# Altium PCB PCB_bug.PcbDoc
Units mil, origin at the board's own origin, x right, y up, seen from the top; angles counter-clockwise.
Board outline 1769.05 x 2764.76 mil, 2 copper layers (Top Layer, Bottom Layer); 72 components, 51 nets, 277 pads, 40 vias.
Unrouted connection lines stored in the file: 1.
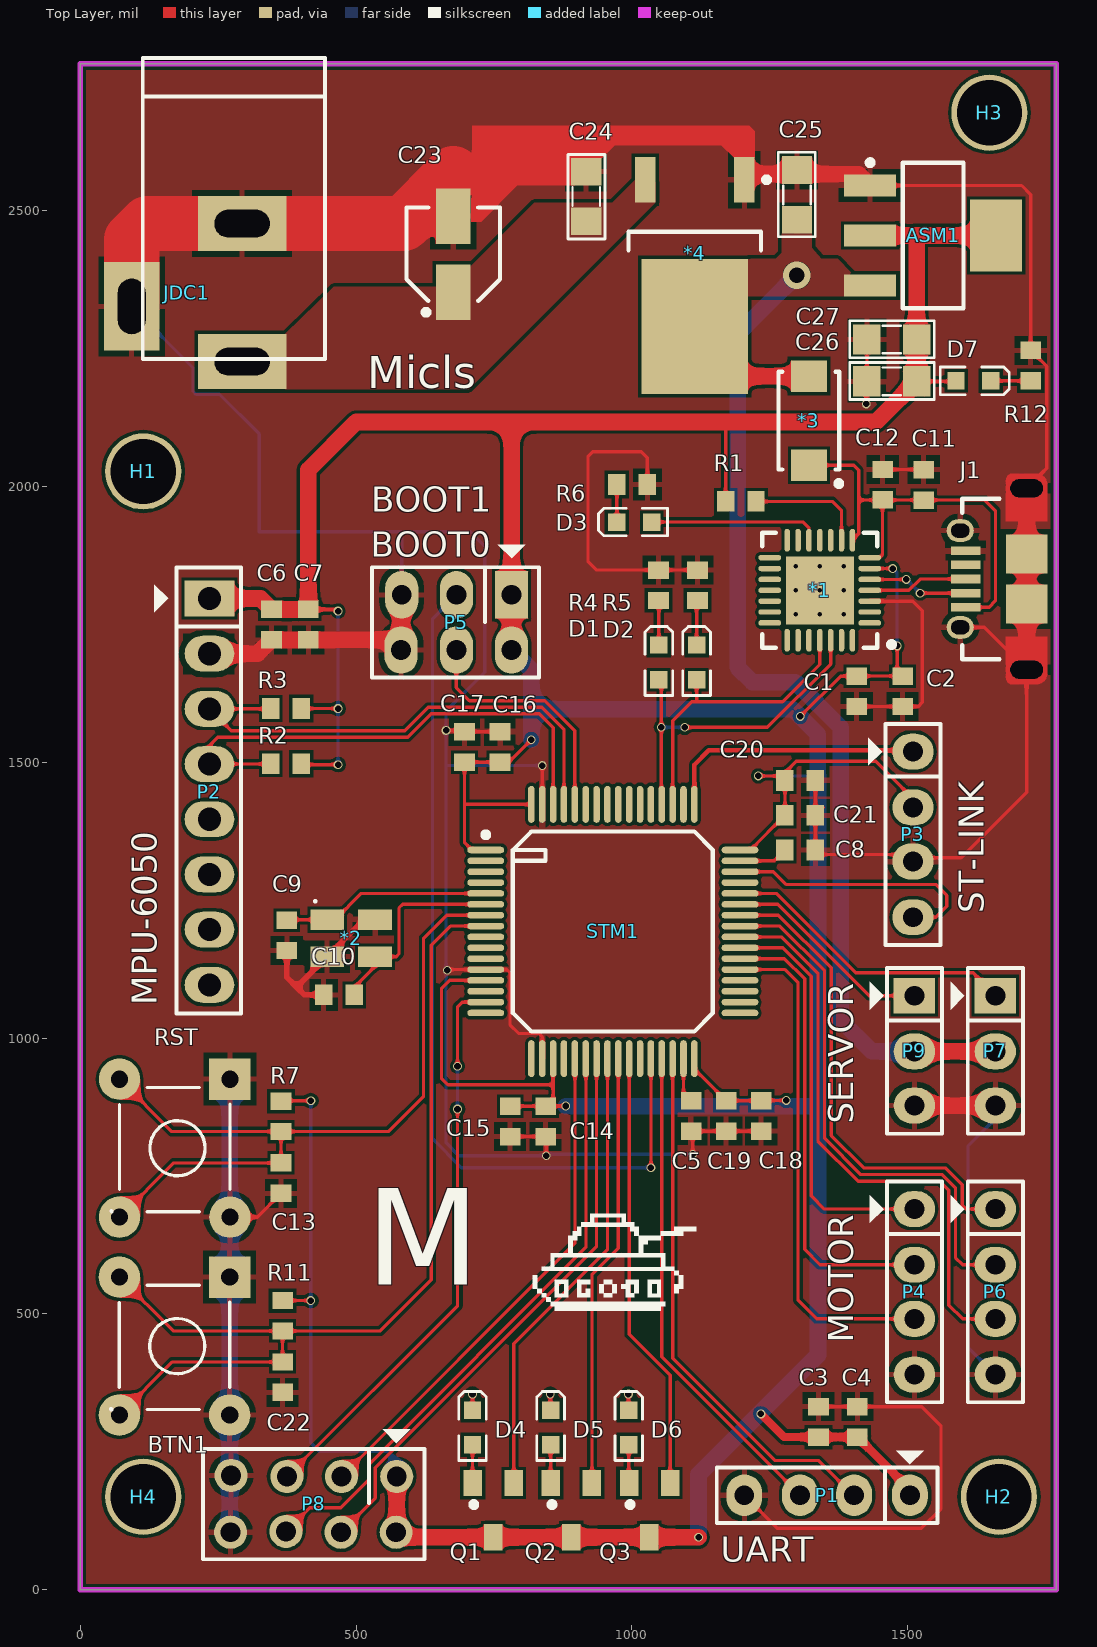
[diagram p0: Top Layer view]
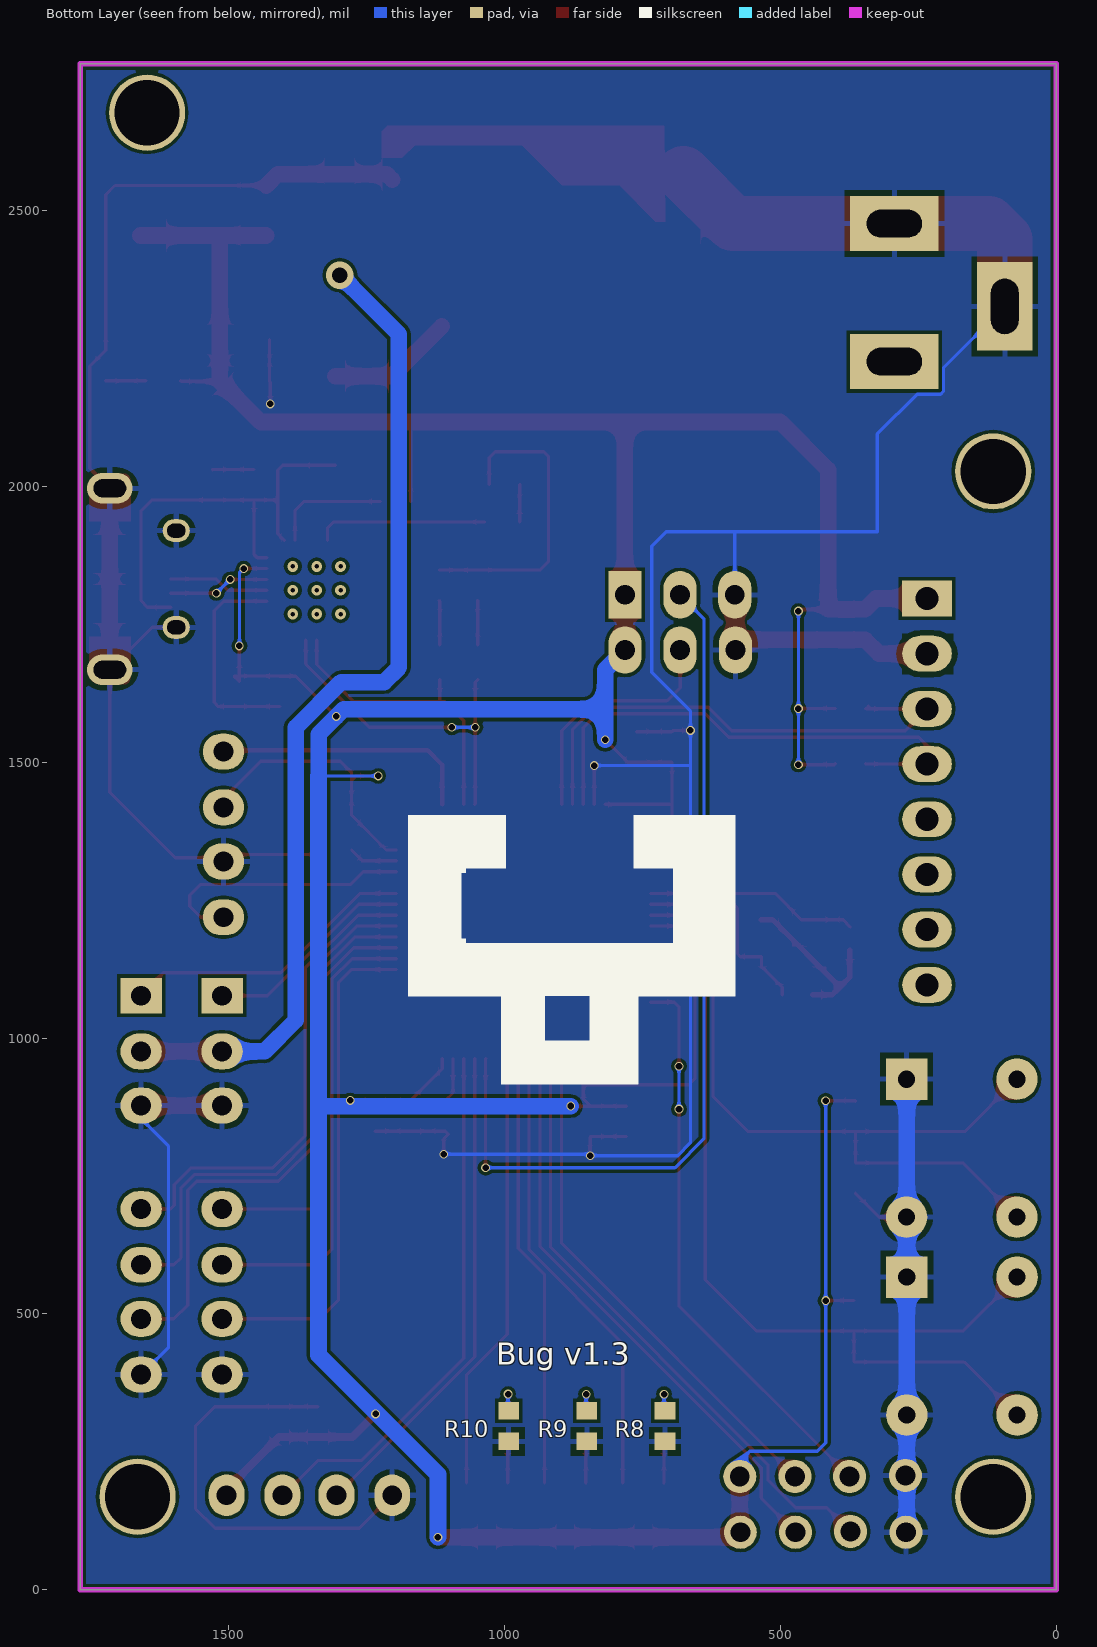
[diagram p1: Bottom Layer view, seen from below]
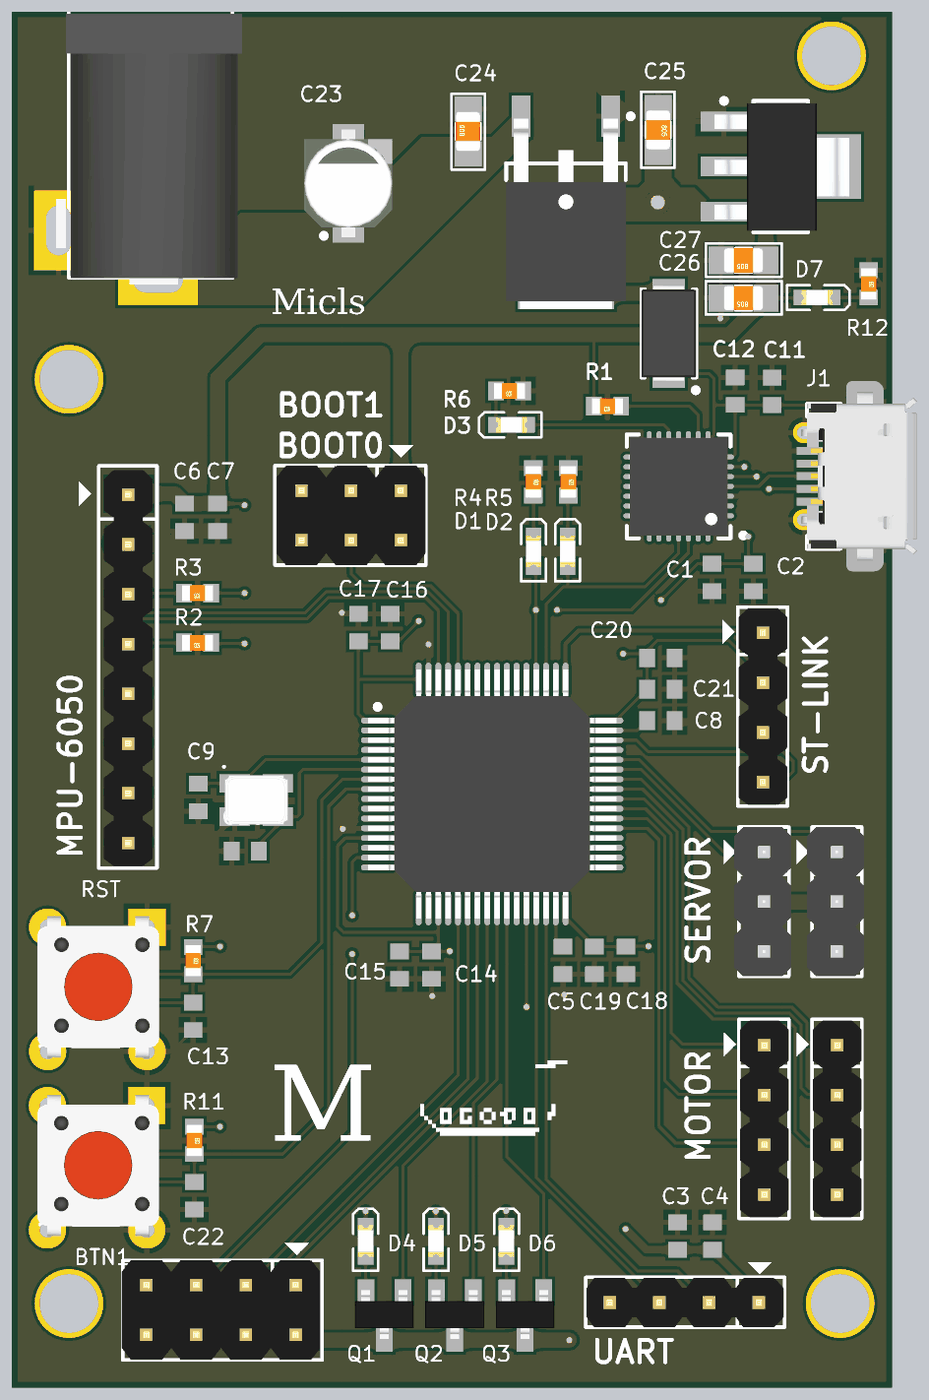
[diagram p2: 3D render of the assembled board from above, using the file's embedded part models]
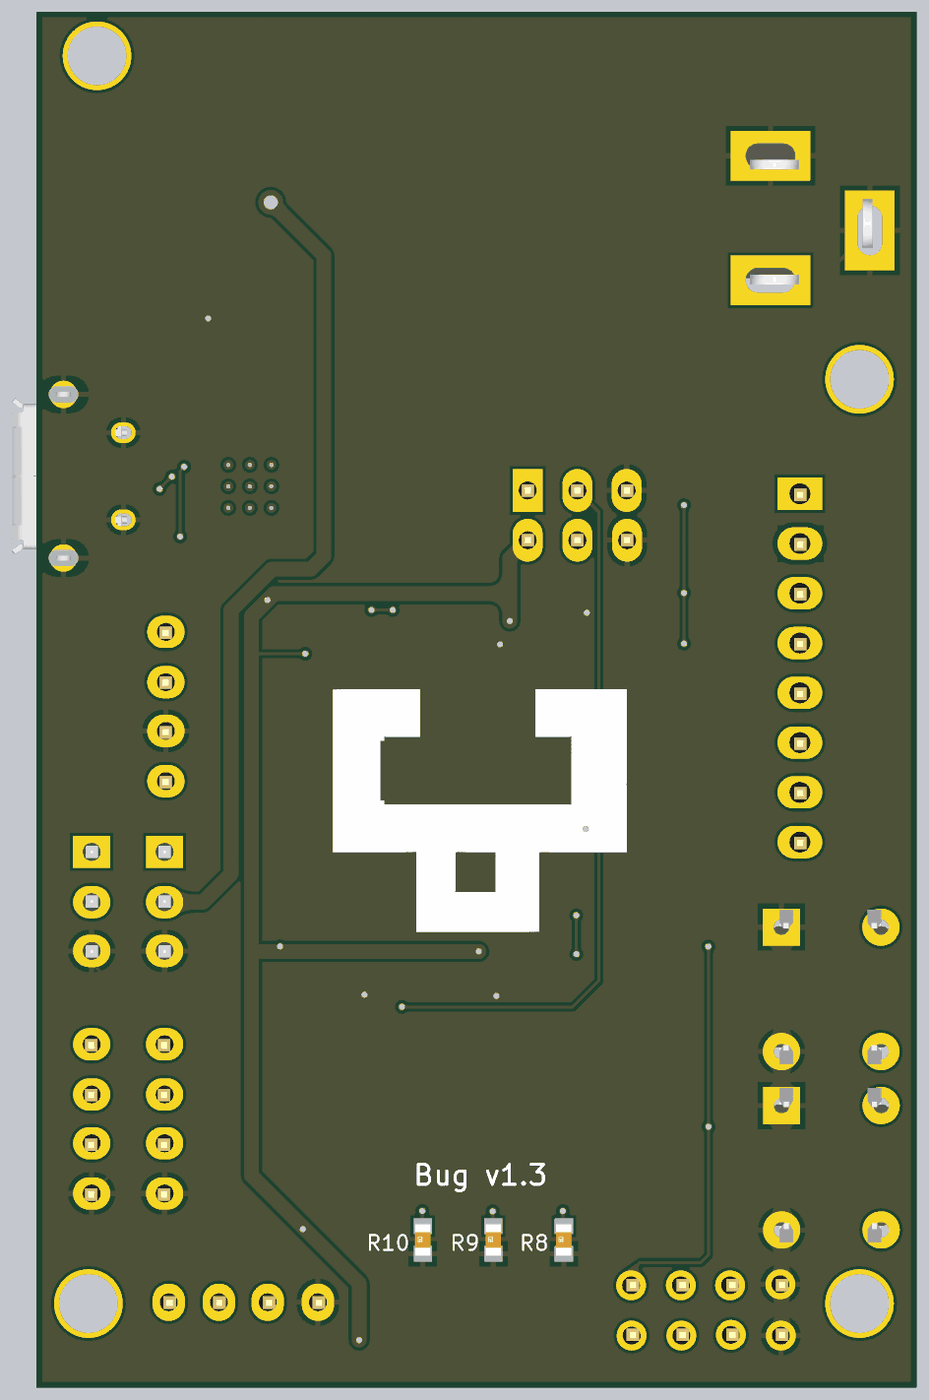
[diagram p3: 3D render of the assembled board from below, using the file's embedded part models]

## Layer stack, top to bottom
Top Solder: solder mask 0.4, Solder Resist, Dk 3.5
Top Layer: signal copper 1.4
Dielectric 1: dielectric 12.6, FR-4, Dk 4.8
Bottom Layer: signal copper 1.4
Bottom Solder: solder mask 0.4, Solder Resist, Dk 3.5

## Board outline
0,0 1769.05,0 1769.05,2764.76 0,2764.76

## Design rules (kind name [scope] priority, off if disabled: settings)
Clearance [All] p1: gap=6 ignorepadtopadclearanceinfootprint=FALSE
DiffPairsRouting [All] p1: maxlimit=10 minlimit=10 mostfreqgap=10 toplayer_minwidth=6 toplayer_maxwidth=30 toplayer_prefwidth=15 bottomlayer_minwidth=6 bottomlayer_maxwidth=30 bottomlayer_prefwidth=15 maxuncoupledlength=500
HoleToHoleClearance [All] p1: gap=6 allowstackedmicrovias=TRUE
MinimumSolderMaskSliver [All] p1: minsoldermaskwidth=6
PolygonConnect PolygonConnect_1 [InNet('Net*_3') vs InNet('Net*_3')] p1: connectstyle=Direct reliefconductorwidth=10 reliefentries=4 polygonreliefangle="90 Angle" airgapwidth=10
PolygonConnect [InNet('GND') vs InNet('GND')] p2: thpad.connectstyle=Relief thpad.reliefconductorwidth=10 thpad.reliefentries=4 thpad.polygonreliefangle="90 Angle" thpad.airgapwidth=10 smdpad.connectstyle=Relief smdpad.reliefconductorwidth=10 smdpad.reliefentries=4 smdpad.polygonreliefangle="90 Angle" smdpad.airgapwidth=10 via.connectstyle=Direct via.reliefconductorwidth=10 via.reliefentries=4 via.polygonreliefangle="90 Angle" via.airgapwidth=10
RoutingVias [All] p1: holewidth=11.81 width=15.75 viastyle="Through Hole" minholewidth=7.87 minwidth=15.75 maxholewidth=50 maxwidth=60
SilkToSilkClearance [All] p1: silktosilkclearance=6
SilkToSolderMaskClearance [IsPad] p1: minsilkscreentomaskgap=0 clearancetoexposedcopper=TRUE
SolderMaskExpansion [All] p1: expansion=0
Width [All] p1: maxlimit=100 minlimit=6 preferedwidth=30
25 further rules are at their usual default settings.

## Classes and differential pairs
differential pair D: +D_P -D_N

## Components (designator, comment, footprint, x,y, rotation, side; value= is the part's Value field where it differs from the comment)
*1 "CP2102" QFN50P500X500X90_HS-29N 1340.26,1811.16 r180 top
*2 "XTAL" "XTAL SMD 4PIN" 491.18,1180.84 r0 top
*3 "Diode" "DIODE SMA (DO-214AC)" 1320.53,2118.6 r270 top
*4 "LD1086" DPAK228P972X230-3N 1113.66,2381.67 r270 top
ASM1 "LM1117" SOT223-4N 1545.6,2453.95 r0 top value=LM317
BTN1 "SW" "Tact SW 4 pin" 271.2,566.89 r270 top value="Button chip 4 pin"
C1 "Cap Non-Pol SMD" CAP-SM-0603 1407.12,1628.11 r270 top value=100pF
C2 "Cap Non-Pol SMD" CAP-SM-0603 1490.22,1628.15 r270 top value=100pF
C3 "Cap Non-Pol SMD" CAP-SM-0603 1338.02,304.59 r90 top value=100pF
C4 "Cap Non-Pol SMD" CAP-SM-0603 1408.28,304.59 r90 top value=100pF
C5 "Cap Non-Pol SMD" CAP-SM-0603 1107.31,858.84 r90 top value=100pF
C6 "Cap Non-Pol SMD" CAP-SM-0603 346.81,1749 r270 top value=100pF
C7 "Cap Non-Pol SMD" CAP-SM-0603 413.54,1749 r270 top value=100pF
C8 "Cap Non-Pol SMD" CAP-SM-0603 1304.64,1340.53 r180 top value=100pF
C9 "Cap Non-Pol SMD" CAP-SM-0603 374.69,1186.13 r90 top value=100pF
C10 "Cap Non-Pol SMD" CAP-SM-0603 469.07,1078.13 r0 top value=100pF
C11 "Cap Non-Pol SMD" CAP-SM-0603 1528.47,2002.11 r90 top value=100pF
C12 "Cap Non-Pol SMD" CAP-SM-0603 1454.14,2002.43 r90 top value=100pF
C13 "Cap Non-Pol SMD" CAP-SM-0603 364.15,746.16 r270 top value=100pF
C14 "Cap Non-Pol SMD" CAP-SM-0603 843.55,849.01 r270 top value=100pF
C15 "Cap Non-Pol SMD" CAP-SM-0603 779.26,849.01 r270 top value=100pF
C16 "Cap Non-Pol SMD" CAP-SM-0603 760.78,1527.43 r90 top value=100pF
C17 "Cap Non-Pol SMD" CAP-SM-0603 696.52,1527.43 r90 top value=100pF
C18 "Cap Non-Pol SMD" CAP-SM-0603 1234.14,858.84 r270 top value=100pF
C19 "Cap Non-Pol SMD" CAP-SM-0603 1170.73,858.84 r270 top value=100pF
C20 "Cap Non-Pol SMD" CAP-SM-0603 1304.65,1466.57 r0 top value=100pF
C21 "Cap Non-Pol SMD" CAP-SM-0603 1304.65,1403.55 r0 top value=100pF
C22 "Cap Non-Pol SMD" CAP-SM-0603 366.99,385.52 r270 top value=100pF
C23 "Cap Pol SMD" "CAP ALU SIZE B" 676.18,2420.06 r90 top value=100pF
C24 "Cap Non-Pol SMD" CAP-SM-0805 916.98,2479.52 r90 top value=100pF
C25 "Cap Non-Pol SMD" CAP-SM-0805 1298.99,2572.53 r270 top value=100pF
C26 "Cap Non-Pol SMD" CAP-SM-0805 1515.63,2189.67 r180 top value=100pF
C27 "Cap Non-Pol SMD" CAP-SM-0805 1515.63,2265.56 r180 top value=100pF
D1 "LED SMD" LED_0603_Blue 1048.76,1680.43 r90 top
D2 "LED SMD" LED_0603_Blue 1117.05,1680.43 r90 top
D3 "LED SMD" LED_0603_Blue 1004.16,1934.74 r180 top
D4 "LED SMD" LED_0603_Blue 711.08,294.4 r90 top
D5 "LED SMD" LED_0603_Blue 852.64,294.4 r90 top
D6 "LED SMD" LED_0603_Blue 994.2,294.4 r90 top
D7 "LED SMD" LED_0603_Blue 1618.55,2190.57 r0 top
H1 "Hole" "LO KHOAN 3MM" 114.61,2026.37 r0 top
H2 "Hole" "LO KHOAN 3MM" 1664.88,169 r0 top
H3 "Hole" "LO KHOAN 3MM" 1647.55,2676.42 r0 top
H4 "Hole" "LO KHOAN 3MM" 114.61,169 r0 top
J1 "629105150921" 629105150921 1714.99,1831.57 r90 top
JDC1 "Jack DC" DC-IN 193.69,2350.45 r270 top value="Jac DC"
P1 "Header 4" JP4 1403.44,171.61 r180 top
P2 "Header 8" JP8 234.48,1796.31 r270 top
P3 "Header 4" JP4 1509.06,1418.78 r270 top
P4 "Header 4" JP4 1511.71,590.15 r270 top
P5 "Header 3X2" JP3x2 681.79,1752.97 r180 top
P6 "Header 4" JP4 1658.28,590.15 r270 top
P7 "Header 3" JP3 1658.28,976.65 r270 top
P8 "Header 4X2" JP4x2 423.29,156.1 r180 top
P9 "Header 3" JP3 1511.71,976.65 r270 top
Q1 "C1815" SOT23B 748.5,144.72 r180 top
Q2 "C1815" SOT23B 890.07,144.72 r180 top
Q3 "C1815" SOT23B 1031.64,144.72 r180 top
R1 "RESISTOR SMD" RES-SM-0603 1224.2,1972.13 r180 top value=1K
R2 "RESISTOR SMD" RES-SM-0603 400.06,1497.06 r180 top value=1K
R3 "RESISTOR SMD" RES-SM-0603 400.06,1596.86 r180 top value=1K
R4 "RESISTOR SMD" RES-SM-0603 1048.14,1847.21 r270 top value=1K
R5 "RESISTOR SMD" RES-SM-0603 1118.66,1847.21 r270 top value=1K
R6 "RESISTOR SMD" RES-SM-0603 1027.28,2002.81 r180 top value=1K
R7 "RESISTOR SMD" RES-SM-0603 364.15,885.13 r270 top value=1K
R8 "RESISTOR SMD" RES-SM-0603 709.3,269.94 r90 bottom value=1K
R9 "RESISTOR SMD" RES-SM-0603 850.87,269.94 r90 bottom value=1K
R10 "RESISTOR SMD" RES-SM-0603 992.44,269.94 r90 bottom value=1K
R11 "RESISTOR SMD" RES-SM-0603 366.99,523.85 r270 top value=1K
R12 "RESISTOR SMD" RES-SM-0603 1722.4,2245.13 r270 top value=1K
RST "SW" "Tact SW 4 pin" 271.58,925.38 r270 top value="Button chip 4 pin" (schematic designator RST1)
STM1 "STM32F405" CQFP50P1150X1150X160-64N 965.37,1192.97 r0 top

## Footprints (in the part's own frame and the unit in brackets; to place one, negate y for a bottom-side part, rotate by r counter-clockwise, add the part's x,y. Pads: shape width x height; smd on the part's side, far side on the other; paste and mask are expansions set on the pad)
629105150921 [mm] "Micro USB 2.0 Type AB Horizontal"
  rect 0.4x1.35 smd: 1(-1.3,2.805) 2(-0.65,2.805) 3(0,2.805) 4(0.65,2.805) 5(1.3,2.805)
  round 0 / inner oval 1.4x2.1 / far side oval 1.4x2.1 hole 0.825 slot 1.5 at 90 deg: Shell(-4.175,0)
  oval 1.05x1.25 hole 0.65 slot 0.85 at 90 deg: Shell(-2.225,3.055) Shell(2.225,3.055)
  rect 1.8x1.9 smd: Shell(-1.15,0) Shell(1.15,0)
  round 0 / inner round 0 / far side oval 1.4x2.1 hole 0.825 slot 1.5 at 90 deg: Shell(4.175,0)
  Top Layer region: 4.353,-0.95 4.544,-0.912 4.706,-0.804 4.814,-0.641 4.852,-0.45 4.852,-0.45 4.852,0.65 4.83,0.765 4.765,0.862 4.667,0.927 4.553,0.95 4.553,0.95 2.668,0.95 2.668,-0.95
  Top Layer region: -4.353,-0.95 -4.544,-0.912 -4.706,-0.804 -4.814,-0.641 -4.852,-0.45 -4.852,-0.45 -4.852,0.65 -4.83,0.765 -4.765,0.862 -4.667,0.927 -4.553,0.95 -4.553,0.95 -2.668,0.95 -2.668,-0.95
  silkscreen extent -3.7,1.25 3.7,2.97, body extent -4.3,-2.64 4.3,3.23, height 2.76
"CAP ALU SIZE B" [mm] "Capacitor, Aluminium Electrolytric, 4.3mm L X 4.3mm W X 5.4mm H, IPC Medium Density"
  rect 2.55x1.6 smd: 1(-1.75,0) 2(1.75,0)
  silkscreen extent -2.8,-2.15 2.15,2.15, body extent -2.75,-2.25 2.75,2.25, height 5.7
CAP-SM-0603 [mm] "SMD Ceramic Capacitor Size 0603"
  rect 0.8x0.95 smd: 1(-0.7,0) 2(0.7,0)
  body extent -0.85,-0.45 0.85,0.45, height 0.6
CAP-SM-0805 [mil] "SMD Ceramic Capacitor Size 0603"
  rect 50x55 smd: 1(0,0) 2(90,0)
  silkscreen extent -32,-34 121,33, body extent 6,-25 84,25, height 31
CQFP50P1150X1150X160-64N [mm] "CQFP, 64-Leads, Body 11.50x11.50mm, Pitch 0.50mm, IPC Medium Density"
  oval 1.7x0.3 smd: 1(-5.85,3.75) 2(-5.85,3.25) 3(-5.85,2.75) 4(-5.85,2.25) 5(-5.85,1.75) 6(-5.85,1.25) 7(-5.85,0.75) 8(-5.85,0.25) 9(-5.85,-0.25) 10(-5.85,-0.75) 11(-5.85,-1.25) 12(-5.85,-1.75) 13(-5.85,-2.25) 14(-5.85,-2.75) 15(-5.85,-3.25) 16(-5.85,-3.75) 33(5.85,-3.75) 34(5.85,-3.25) 35(5.85,-2.75) 36(5.85,-2.25) 37(5.85,-1.75) 38(5.85,-1.25) 39(5.85,-0.75) 40(5.85,-0.25) 41(5.85,0.25) 42(5.85,0.75) 43(5.85,1.25) 44(5.85,1.75) 45(5.85,2.25) 46(5.85,2.75) 47(5.85,3.25) 48(5.85,3.75)
  oval 0.3x1.7 smd: 17(-3.75,-5.85) 18(-3.25,-5.85) 19(-2.75,-5.85) 20(-2.25,-5.85) 21(-1.75,-5.85) 22(-1.25,-5.85) 23(-0.75,-5.85) 24(-0.25,-5.85) 25(0.25,-5.85) 26(0.75,-5.85) 27(1.25,-5.85) 28(1.75,-5.85) 29(2.25,-5.85) 30(2.75,-5.85) 31(3.25,-5.85) 32(3.75,-5.85) 49(3.75,5.85) 50(3.25,5.85) 51(2.75,5.85) 52(2.25,5.85) 53(1.75,5.85) 54(1.25,5.85) 55(0.75,5.85) 56(0.25,5.85) 57(-0.25,5.85) 58(-0.75,5.85) 59(-1.25,5.85) 60(-1.75,5.85) 61(-2.25,5.85) 62(-2.75,5.85) 63(-3.25,5.85) 64(-3.75,5.85)
  silkscreen extent -5.97,-4.6 4.6,4.6, body extent -6.35,-6.35 6.35,6.35, height 1.53
DC-IN [mil] "Jac DC input"
  rect 100x160 hole 50 slot 100 at 90 deg: 1(125,100) 2(-125,100)
  rect 160x100 hole 50 slot 100 at 0 deg: 3(25,-100)
  silkscreen extent -425,-80 120,250, body extent -410,-105 134,269, height 434
"DIODE SMA (DO-214AC)" [mm]
  rect 1.45x1.65 smd: 1(-2.05,0) 2(2.05,0)
  silkscreen extent -2.25,-1.4 3.02,1.5, body extent -2.47,-1.4 2.47,1.4, height 2.3
DPAK228P972X230-3N [mm] "D-PAK, 3-Pads, Body 6.15x6.41mm (max), IPC Medium Density"
  rect 2.1x0.95 smd: 1(-4.4,2.28) 3(-4.4,-2.28)
  rect 6.2x4.9 smd: 4(2.35,0)
  silkscreen extent -4.52,-3.05 -1.15,3.43, body extent -4.27,-3.05 5.45,3.05, height 2.3
JP3 [mil] "Jumper 3"
  rect 65x75 hole 36: 1(-100,0)
  oval 65x75 hole 36: 2(1,0) 3(99,0)
  silkscreen extent -150,-81 150,50, body extent -150,-60 150,55, height 355
JP3x2 [mil] "Connector 3x2"
  rect 60x86 hole 36: 1(-100,-50)
  oval 60x86 hole 36: 2(0,-50) 3(99,-50) 4(-100,50) 5(0,50) 6(100,50)
  silkscreen extent -150,-141 153,100, body extent -150,-100 150,100, height 335
JP4 [mil] "Jumper 4"
  oval 65x75 hole 36: 1(-100,0) 2(1,0) 3(99,0) 4(200,0)
  silkscreen extent -150,-81 250,50, body extent -148,-48 248,50, height 323
JP4x2 [mil] "Connector 4x2"
  round 60 hole 36: 1(-150.5,-49.5) 2(-50.5,-49.5) 3(48.5,-49.5) 4(149.5,-51.5) 5(-149.5,51.5) 6(-49.5,51.5) 7(50,50) 8(150.5,51.5)
  silkscreen extent -200,-135 200,101, body extent -197,-100 203,100, height 335
JP8 [mil] "JP8"
  rect 65x90 hole 42: 1(0,0)
  oval 65x90 hole 42: 2(100,0) 3(200,0) 4(300,0) 5(400,0) 6(500,0) 7(600,0) 8(700,0)
  silkscreen extent -56,-100 752,57, body extent -48,-50 748,48, height 323
LED_0603_Blue [mm] "Chip LED, 2-Leads, Body 1.6x0.8mm, IPC Medium Density"
  rect 0.8x0.8 smd: 1(-0.8,0) 2(0.8,0)
  silkscreen extent -1.52,-0.64 1.65,0.64, body extent -0.8,-0.4 0.8,0.4, height 0.7
"LO KHOAN 3MM" [mil]
  round 138 hole 118.1: 1(0,0)
QFN50P500X500X90_HS-29N [mm] "QFN, 28-Leads, Body 5.00x5.00mm, Pitch 0.50mm, Thermal Pad 3.13x3.13mm, IPC Medium Density"
  oval 1.05x0.25 smd: 1(-2.3,1.5) 2(-2.3,1) 3(-2.3,0.5) 4(-2.3,0) 5(-2.3,-0.5) 6(-2.3,-1) 7(-2.3,-1.5) 15(2.3,-1.5) 16(2.3,-1) 17(2.3,-0.5) 18(2.3,0) 19(2.3,0.5) 20(2.3,1) 21(2.3,1.5)
  oval 0.25x1.05 smd: 8(-1.5,-2.3) 9(-1,-2.3) 10(-0.5,-2.3) 11(0,-2.3) 12(0.5,-2.3) 13(1,-2.3) 14(1.5,-2.3) 22(1.5,2.3) 23(1,2.3) 24(0.5,2.3) 25(0,2.3) 26(-0.5,2.3) 27(-1,2.3) 28(-1.5,2.3)
  rect 3.13x3.13 smd: 29(0,0)
  silkscreen extent -3.43,-2.65 2.65,2.65, body extent -2.52,-2.52 2.52,2.52, height 0.9
RES-SM-0603 [mm]
  rect 0.8x0.95 smd: 1(-0.014,0) 2(1.386,0)
  body extent -0.11,-0.4 1.49,0.4, height 0.3
SOT23B [mm] "SOT 23B"
  rect 0.85x1.2 smd: 1(0.94,-1.245) 2(0,1.25) 3(-0.95,-1.25)
  silkscreen extent 0.77,-0.38 1.02,-0.13, body extent -1.5,-1.3 1.5,1.2, height 1.06
SOT223-4N [mm] "SOT223, 4-Leads, Body 6.5x3.5mm, Pitch 2.3mm, Lead Span 7mm, IPC Medium Density"
  rect 2.4x1 smd: 1(-2.9,2.3) 2(-2.9,0) 3(-2.9,-2.3)
  rect 2.4x3.3 smd: 4(2.9,0)
  silkscreen extent -3.02,-3.35 1.4,3.47, body extent -3.39,-3.27 3.5,3.23, height 1.72
"Tact SW 4 pin" [mil] "SW button 4pin, 250 x250 mil"
  rect 75x75 hole 31: 1(0,0)
  round 75 hole 31: 2(250,-200) 3(250,0) 4(0,-200)
  silkscreen extent 15,-215 240,0, body extent -36,-220 276,24, height 276
"XTAL SMD 4PIN" [mm]
  rect 1.55x0.95 smd: 1(-1.1,0.85) 2(-1.1,-0.85) 3(1.1,-0.85) 4(1.1,0.85)
  silkscreen extent -1.7,1.65 -1.6,1.75, body extent -1.6,-1.25 1.6,1.25, height 0.55

## Part data
ASM1: "Available in 1.8V, 2.5V, 2.85V, 3.3V, 5V, and  Adjustable Versions"
BTN1 RST: library part "Tact SW - 4Pin", "Switch button 4 pin"
C1 C2 C3 C4 C5 C6 C7 C8 C9 C10 C11 C12 C13 C14 C15 C16 C17 C18 C19 C20 C21 C22 C24 C25 C26 C27: "Capacitor"
C23: "Polarized Capacitor (Radial)"
D1 D2 D3 D4 D5 D6 D7: "LED"
H1 H2 H3 H4: "Hole 3mm"
J1: "Micro USB 2.0 Type AB Receptacle WR-COM, Horizontal, SMT", Contact Resistance="30 mOhm", Operating Temperature="-40 to 85 degC", Rated Current="1.8 A", Working Voltage="30 VAC", ComponentLink1Description=Manufacturer, ComponentLink1URL=http://www.we-online.de, ComponentLink2Description=Datasheet, ComponentLink2URL=https://katalog.we-online.de/em/datasheet/629105150921.pdf, Connector Type="Micro USB 2.0 Type AB", Gender=Receptacle, Mounting Technology=SMT, Orientation=Horizontal, Packaging="Tape and Reel", Part Number=629105150921, Published Date="September 2018", Publisher="Wurth Elektronik"
JDC1: "Jack DC input"
P1 P3 P4 P6: "Header, 4-Pin", LatestRevisionDate=17-Jul-2002, LatestRevisionNote="Re-released for DXP Platform.", Publisher="Altium Limited"
P2: "Header, 8-Pin", LatestRevisionDate=17-Jul-2002, LatestRevisionNote="Re-released for DXP Platform.", Publisher="Altium Limited"
P5: "Header, 3-Pin, Dual row", LatestRevisionDate=17-Jul-2002, LatestRevisionNote="Re-released for DXP Platform.", Publisher="Altium Limited"
P7 P9: "Header, 3-Pin", LatestRevisionDate=17-Jul-2002, LatestRevisionNote="Re-released for DXP Platform.", Publisher="Altium Limited"
P8: "Header, 4-Pin, Dual row", LatestRevisionDate=17-Jul-2002, LatestRevisionNote="Re-released for DXP Platform.", Publisher="Altium Limited"
Q1 Q2 Q3: "NPN Bipolar Transistor"
R1 R2 R3 R4 R5 R6 R7 R8 R9 R10 R11 R12: "Resistor"

## Via types
v1: diameter 15.75, hole 11.81, Top Layer to Bottom Layer, tented both sides, 30 vias
v2: diameter 19.68, hole 7.87, Top Layer to Bottom Layer, tented both sides, 9 vias
v3: diameter 50, hole 28, Top Layer to Bottom Layer, tented both sides, 1 vias

## Nets (pads, with @x,y where several pads share a name; then routed paths per layer and width w, separated by ;. In a path a pad name is that pad's centre, name@x,y a point inside that pad or via, vN(x,y) a via of type N, cw(c..) or ccw(c..) an arc to the next point about the centre after c; other vN are vias at no path point)
D_N: *1.5 J1.2 | length 184
  Top Layer w6: *1.5 v1(1497.01,1830.84) ; v1(1521.87,1805.98) J1.2
  Bottom Layer w6: v1(1497.01,1830.84) v1(1521.87,1805.98)
D_P: *1.4 J1.3 | length 182.2
  Top Layer w6: *1.4 1501.49,1811.16 1521.91,1831.57 J1.3
GND: *1.3 *2.2 *2.4 *4.1 ASM1.1 BTN1.1 BTN1.3 C1.2 C2.2 C3.2 C4.2 C5.1 C6.2 C7.2 C8.1 C9.1 C10.1 C11.2 C12.2 C13.2 C14.2 C15.2 C16.2 C17.2 C18.2 C19.2 C20.2 C21.2 C22.2 C23.2 C24.2 C25.1 C26.2 C27.2 J1.5 J1.Shell JDC1.2 JDC1.3 P1.4 P2.2 P3.3 P4.4 P5.3 P5.6 P6.4 P7.3 P8.4 P8.8 P9.3 R4.1 R5.1 R6.1 R8.1 R9.1 R10.1 R12.1 RST.1 RST.3 STM1.12 STM1.18 STM1.63 | length 11054.4
  Top Layer w6: RST.3 320.93,675.38 C13.2 ; v1(663.15,1557.24) 694.27,1557.24 C17.2 C16.2 ; v1(665.05,1122.76) 666.36,1124.08 STM1.12 772.84,1124.08 779.12,1117.79 779.12,1023.55 794.39,1008.27 831.07,1008.27 837.42,1001.93 STM1.18 ; C15.2 C14.2 843.79,821.69 844.84,820.64 v1(844.84,786.91) ; STM1.63 v1(837.42,1493.63) ; R6.1 1027.84,2050.98 1016.79,2062.03 928.75,2062.03 920.18,2053.46 920.18,1863.64 936.04,1847.77 R4.1 R5.1 ; v1(1110.12,789.67) 1110.12,817.07 1101.61,825.58 C5.1 C19.2 C18.2 ; P1.4 1263.34,111.71 1524.2,111.71 1559.94,147.46 1559.94,297.01 1524.8,332.15 C4.2 C3.2 ; C20.2 C21.2 ; C21.2@1346.44,1417.78 C21.2 ; C1.2 1518.51,1600.55 1525.89,1607.92 1525.89,1773.97 1508.39,1791.47 *1.3 ; v1(1424.16,2148.69) 1424.16,2188.2 C26.2 C27.2 ; ASM1.1 1705.73,2544.5 1722.4,2527.83 R12.1 1751.5,2216.59 1751.5,2032.46 1714.99,1995.95 ; C12.2 1528.16,2029.99 C11.2 ; J1.Shell@1594.71,1743.98 1638.21,1743.98 1714.99,1667.2 1714.99,1445.47 1596.17,1326.65 1502.19,1326.65 1496.35,1332.5 1340.23,1332.5 C8.1 C21.2
  Top Layer w10: C9.1 374.69,1109.75 392.48,1091.96 ; C10.1 406.31,1078.13 392.48,1091.96 ; *2.4 514.82,1214.3 392.48,1091.96
  Top Layer w30: P2.2 321.68,1696.31 C6.2 C7.2 563.31,1721.44 P5.6 581.79,1801.97 P5.3 ; *4.1 1213.53,2565.01 1410.91,2565.01 ASM1.1 ; P9.3 P7.3 P7.3@1659.93,877.65 ; 1714.99,1667.2 1714.99,1786.3 1714.99,1876.85 1714.99,1995.95
  Top Layer w100: JDC1.3 93.69,2446.71 122.43,2475.45 JDC1.2 585.89,2475.45 676.18,2565.73
  Bottom Layer w6: JDC1.3 204.69,2214.45 204.69,2171.72 209.96,2166.45 252.69,2166.45 324.84,2094.3 324.84,1917.17 582.91,1917.17 ; P5.3 582.79,1917.05 582.91,1917.17 ; 663.55,1493.63 v1(837.42,1493.63) ; v1(1110.12,789.67) 847.61,789.67 v1(844.84,786.91) 686.12,786.91 663.15,809.89 v1(663.15,1557.24) 663.15,1592.55 733,1662.4 733,1891.35 707.18,1917.17 582.91,1917.17 ; P6.4 1608.66,439.77 1608.66,803.61 1682.7,877.65 P7.3@1659.93,877.65
  Bottom Layer w30: RST.1 271.2,925 BTN1.1 BTN1.3 271.2,106.19 P8.8
LED_G: Q3.3 STM1.26 | length 799.4
  Top Layer w6: STM1.26 994.9,463.56 1069.04,389.42 Q3.3
LED_R: Q1.3 STM1.24 | length 839
  Top Layer w6: Q1.3 785.9,446.52 955.53,616.15 STM1.24
LED_Y: Q2.3 STM1.25 | length 788.5
  Top Layer w6: Q2.3 927.47,571.12 975.21,618.86 STM1.25
Net*1_9: *1.9 R1.1 | length 215.3
  Top Layer w6: R1.1 1362.59,1972.13 1379.63,1955.09 *1.9
Net*1_12: *1.12 D3.1 | length 312
  Top Layer w6: D3.1 1310.45,1934.74 1320.58,1924.62 *1.12
Net*1_25: *1.25 D2.1 STM1.51 | length 544
  Top Layer w6: STM1.51 1073.64,1574.67 1108.17,1609.21 1116.9,1609.21 ; D2.1 1117.05,1609.35 1116.9,1609.21 ; *1.25 1340.26,1676.7 1272.78,1609.21 1116.9,1609.21
Net*1_26: *1.26 D1.1 STM1.52 | length 625.2
  Top Layer w6: D1.1 1053.12,1644.58 v1(1053.12,1562.79) 1053.12,1424.12 STM1.52 ; v1(1095.75,1562.79) 1245.23,1562.79 1359.95,1677.51 *1.26
  Bottom Layer w6: v1(1053.12,1562.79) v1(1095.75,1562.79)
Net*2_1: *2.1 C9.2 STM1.5 | length 387
  Top Layer w6: C9.2@373.28,1201.02 386.57,1214.3 *2.1 462.11,1214.3 509.68,1261.87 STM1.5
Net*2_3: *2.3 C10.2 STM1.6 | length 373.6
  Top Layer w6: C10.2 496.63,1091.76 534.49,1129.62 *2.3 572.91,1147.37 577.89,1152.36 577.89,1235.67 584.4,1242.19 STM1.6
Net*4_3: *4.3 C23.1 C24.1 JDC1.1
NetBTN1_2: BTN1.2 BTN1.4 C22.1 R11.2 STM1.8 | length 1755.3
  Top Layer w6: BTN1.2 167.38,413.08 C22.1 R11.2 ; BTN1.4 168.8,469.29 R11.2 ; STM1.8 671.04,1202.82 636.47,1168.24 636.47,561.68 544.09,469.29 R11.2
NetC5_2: C5.2 STM1.31 | length 82.1
  Top Layer w6: STM1.31 1093.32,900.38 C5.2
NetC8_2: C8.2 STM1.47 | length 89.5
  Top Layer w6: STM1.47 1257.48,1320.93 C8.2
NetC13_1: C13.1 R7.2 RST.2 RST.4 STM1.7 | length 1423.1
  Top Layer w6: RST.2 169.92,773.72 C13.1 R7.2 ; RST.4 166.39,830.57 R7.2 ; STM1.7 664.2,1222.5 622.44,1180.75 622.44,894.18 558.83,830.57 R7.2
NetD1_2: D1.2 R4.2 | length 81
  Top Layer w6: R4.2 1048.76,1792.02 D1.2
NetD2_2: D2.2 R5.2 | length 81.4
  Top Layer w6: D2.2 1117.05,1791.04 R5.2
NetD3_2: D3.2 R6.2 | length 68.1
  Top Layer w6: D3.2 972.66,2002.75 R6.2
NetD4_1: D4.1 Q1.1 | length 70
  Top Layer w6: Q1.1 711.08,194.15 D4.1 D4.1@711.5,262.48
NetD4_2: D4.2 R8.2 | length 60.1
  Top Layer w6: D4.2 v1(711.04,354.87) ; v1(711.04,354.87) v1(711.04,354.87)
  Bottom Layer w6: R8.2 711.04,326.23 v1(711.04,354.87)
NetD5_1: D5.1 Q2.1 | length 70
  Top Layer w6: Q2.1 852.64,194.15 D5.1 D5.1@853.07,262.48
NetD5_2: D5.2 R9.2 | length 59.4
  Top Layer w6: v1(852.07,354.54) 852.07,326.47 D5.2
  Bottom Layer w6: R9.2 852.07,325.69 v1(852.07,354.54)
NetD6_1: D6.1 Q3.1 | length 70
  Top Layer w6: Q3.1 994.2,194.16 D6.1 D6.1@994.64,262.47
NetD6_2: D6.2 R10.2 | length 60.2
  Top Layer w6: v1(993.63,354.93) 993.63,326.47 D6.2
  Bottom Layer w6: R10.2 993.63,325.69 v1(993.63,354.93)
NetD7_2: D7.2 R12.2 | length 72.4
  Top Layer w6: D7.2 R12.2
NetP1_2: P1.2 STM1.30 | length 974.7
  Top Layer w6: STM1.30 1073.64,419.39 1258.36,234.66 1337.65,234.66 1400.7,171.61 P1.2
NetP1_3: P1.3 STM1.29 | length 894.8
  Top Layer w6: STM1.29 1053.95,422.1 P1.3
NetP2_3: P2.3 R3.2 STM1.61 | length 954.8
  Top Layer w6: R3.2@341.17,1601.18 336.85,1596.86 R3.2 344.95,1596.31 P2.3 273.98,1556.81 588.52,1556.81 630.94,1599.23 836.83,1599.23 876.79,1559.27 STM1.61
NetP2_4: P2.4 R2.2 STM1.62 | length 954.1
  Top Layer w6: R2.2 344.75,1496.31 P2.4 217.81,1512.98 249.64,1544.81 593.49,1544.81 635.91,1587.23 831.86,1587.23 857.1,1561.99 STM1.62
NetP4_1: P4.1 STM1.39 | length 747.1
  Top Layer w6: STM1.39 1273.53,1163.45 1324.84,1112.14 1324.84,714.01 1348.69,690.15 P4.1@1513.54,690.15
NetP4_2: P4.2 STM1.38 | length 834.8
  Top Layer w6: STM1.38 1276.25,1143.76 1312.84,1107.17 1312.84,616.94 1340.62,589.15 P4.2@1513.54,589.15
NetP4_3: P4.3 STM1.37 | length 917.1
  Top Layer w6: STM1.37 1277.26,1124.08 1300.84,1100.5 1300.84,525.01 1334.69,491.15 P4.3@1513.54,491.15
NetP5_2: P5.2 STM1.28 | length 1618.4
  Top Layer w6: STM1.28 1034.32,962.6 v1(1034.32,765.05)
  Bottom Layer w6: P5.2 638.67,1759.85 638.67,817.39 691.01,765.05 v1(1034.32,765.05)
NetP5_5: P5.5 STM1.60 | length 448.4
  Top Layer w6: P5.5 681.79,1634.96 705.51,1611.23 841.8,1611.23 896.47,1556.56 STM1.60
NetP6_1: P6.1 STM1.42 | length 882.6
  Top Layer w6: STM1.42 1265.39,1222.5 1360.84,1127.05 1360.84,823.24 1419.46,764.61 1567.43,764.61 1598.09,733.95 1598.09,697.23 1605.18,690.15 P6.1
NetP6_2: P6.2 STM1.41 | length 969
  Top Layer w6: STM1.41 1268.1,1202.82 1348.84,1122.08 1348.84,818.27 1414.49,752.61 1562.46,752.61 1586.09,728.98 1586.09,602.31 1599.25,589.15 P6.2
NetP6_3: P6.3 STM1.40 | length 1049.1
  Top Layer w6: STM1.40 1270.82,1183.13 1336.84,1117.11 1336.84,813.3 1409.52,740.61 1557.49,740.61 1574.09,724.01 1574.09,515.91 1598.85,491.15 P6.3
NetP7_1: P7.1 STM1.44 | length 541
  Top Layer w6: STM1.44 1261.77,1261.87 1405.49,1118.15 1618.43,1118.15 P7.1@1659.93,1076.65
NetP8_2: P8.2 STM1.21 | length 932.5
  Top Layer w6: P8.2 896.92,628.73 896.92,962.21 STM1.21
NetP8_3: P8.3 STM1.15 | length 1033.6
  Top Layer w6: P8.3 683.89,514.7 v1(683.89,871.37) ; v1(683.89,949.02) 683.89,1056.47 692.44,1065.02 STM1.15
  Bottom Layer w6: v1(683.89,871.37) v1(683.89,949.02)
NetP8_6: P8.6 STM1.23 | length 1049.9
  Top Layer w6: P8.6 534.79,166.6 534.79,221.75 935.84,622.8 STM1.23
NetP8_7: P8.7 STM1.22 | length 1114.7
  Top Layer w6: P8.7 416.39,149.2 472.55,149.2 522.79,199.44 522.79,226.72 916.61,620.54 916.61,962.2 STM1.22
NetP9_1: P9.1 STM1.43 | length 384.6
  Top Layer w6: STM1.43 1264.48,1242.19 1430.02,1076.65 P9.1
NetSTM1_33: STM1.33
SWCLK: P3.1 STM1.49 | length 481.8
  Top Layer w7.87: STM1.49 1113.01,1495.02 1139.16,1521.17 P3.1@1512.29,1521.17
SWDIO: P3.4 STM1.46 | length 481.8
  Top Layer w6: STM1.46 1256.01,1301.24 1278.99,1278.26 1550.53,1278.26 1570.45,1258.34 1570.45,1238.7 1550.54,1218.78 P3.4
VCC_3.3V: *1.6 ASM1.2 ASM1.4 C1.1 C2.1 C3.1 C4.1 C6.1 C7.1 C14.1 C15.1 C16.1 C17.1 C18.1 C19.1 C20.1 C21.1 C26.1 C27.1 D7.1 P1.1 P2.1 P3.2 P5.1 P5.4 P8.1 P8.5 Q1.2 Q2.2 Q3.2 R1.2 R2.1 R3.1 R7.1 R11.1 STM1.1 STM1.13 STM1.19 STM1.32 STM1.48 STM1.64 | length 10249.4
  Top Layer w6: R7.1 364.83,886.37 v1(418.42,886.37) ; R11.1 v1(418.14,524.41) ; R2.1 402.43,1495.24 v1(467.44,1495.24) ; R3.1 v1(467.44,1596.86) ; C7.1 464.37,1776.56 v1(467.44,1773.5) ; STM1.13 670.12,1104.39 654.88,1089.16 654.88,927.05 666.56,915.38 857.1,915.38 ; STM1.1 710.21,1340.61 696.52,1354.3 696.52,1424.86 ; C15.1 C14.1 ; STM1.64 698.1,1423.29 696.52,1424.86 ; v1(817.73,1540.45) 777.15,1499.87 C16.1 C17.1 696.52,1424.86 ; STM1.19 857.1,915.38 ; v1@880.05,876.57 C14.1 ; STM1.32 1113.01,944.11 C19.1 C18.1 1234.7,886.95 v1(1279.67,886.95) ; 1169.06,2116 1169.64,2115.42 R1.2 ; STM1.48 1214.15,1340.61 C21.1 C20.1 ; v1(1228.89,1474.81) 1268.84,1474.81 C20.1 ; v1(1304.85,1582.63) 1377.88,1655.67 C1.1 1407.16,1655.71 C2.1@1480.46,1655.71 ; *1.6 v1(1472.39,1850.53) ; v1(1480.46,1710.29) C2.1@1480.46,1655.71 ; P3.2 1509.06,1434.15 1441.95,1501.26 1297.57,1501.26 1277.09,1480.78 C20.1 ; C26.1 1586.15,2189.67 D7.1 ; C14.1 857.1,890.12 857.1,915.38 ; C2.1@1480.46,1655.71 1480.46,1645.95 C2.1 C2.1@1480.46,1655.71
  Top Layer w15: v1(1233.7,318.85) 1275.51,277.04 C3.1 C4.1 1503.44,181.87 P1.1
  Top Layer w30: P2.1 327.07,1796.31 C6.1 C7.1 413.54,2029.31 500.23,2116 781.79,2116 ; P8.1 573.79,105.6 P8.5 581.88,95.51 Q1.2 Q2.2 Q3.2 v1(1120.54,95.51) ; P5.4 P5.1 781.79,2116 ; ASM1.2 1515.4,2453.95 ; ASM1.4 1515.4,2453.95 ; 781.79,2116 1169.06,2116 1247.42,2116 1441.96,2116 C26.1 C27.1 1515.63,2453.72 1515.4,2453.95
  Bottom Layer w6: v1(418.42,886.37) 418.14,886.09 v1(418.14,524.41) 418.14,266.59 433.2,251.53 555.97,251.53 573.79,233.71 P8.1 ; v1(467.44,1495.24) v1(467.44,1596.86) v1(467.44,1773.5) ; v1(1228.89,1474.81) 1322.6,1474.81 1329.89,1467.53 1336.93,1474.57 1337,1474.64 ; v1@1304.85,1576.8 1304.85,1582.39 v1(1304.85,1582.63) ; v1(1472.39,1850.53) 1480.14,1842.78 1480.14,1710.6 v1(1480.46,1710.29)
  Bottom Layer w30: P8.5 P8.5@573.79,105.6 ; P5.4 817.73,1667.02 817.73,1595.67 ; v1(817.73,1540.45) 817.73,1595.67 ; v1@880.05,876.57 1330.51,876.57 ; v1(1120.54,95.51) 1120.54,209.18 1337,425.64 1337,1474.64 ; 1336.93,1474.57 1336.93,1550.31 1304.85,1582.39 1291.57,1595.67 817.73,1595.67
  other v1: 880.05,876.81
VCC_5V: *3.1 *4.4 ASM1.3 C25.2 P7.2 P9.2 | length 2052.3
  Top Layer w30: *4.4 1203.71,2199.09 *3.1@1306.31,2199.09 ; P9.2 P7.2 P7.2@1659.93,975.65
  Bottom Layer w30: v3(1298.31,2381.95) 1191.38,2275.02 1191.38,1671.32 1217.97,1644.74 1296.11,1644.74 1378.13,1562.72 1378.13,1032.27 1434.76,975.65 P9.2
VCC_5V_USB: *1.7 *1.8 *3.2 C11.1 C12.1 J1.1 | length 842.5
  Top Layer w6: *3.2@1306.31,2037.68 1401.92,2037.68 1410.91,2028.69 1410.91,1974.55 ; *1.8 1410.91,1913.3 1410.91,1974.55 ; *1.7 1448.44,1870.21 1453.83,1875.61 C12.1@1453.83,1974.55 ; C12.1 C12.1@1453.83,1974.55 ; J1.1 1647.07,1780.39 1658.53,1791.85 1658.53,1955.26 1639.24,1974.55 C11.1 C12.1@1453.83,1974.55 ; 1410.91,1974.55 C12.1@1453.83,1974.55
pads on no net: *1.1 *1.2 *1.10 *1.11 *1.13 *1.14 *1.15 *1.16 *1.17 *1.18 *1.19 *1.20 *1.21 *1.22 *1.23 *1.24 *1.27 *1.28 *1.29 H1.1 H2.1 H3.1 H4.1 J1.4 P2.5 P2.6 P2.7 P2.8 STM1.2 STM1.3 STM1.4 STM1.9 STM1.10 STM1.11 STM1.14 STM1.16 STM1.17 STM1.20 STM1.27 STM1.34 STM1.35 STM1.36 STM1.45 STM1.50 STM1.53 STM1.54 STM1.55 STM1.56 STM1.57 STM1.58 STM1.59
copper on no net:
  other v2: 1296.96,1767.85 1340.26,1767.85 1383.57,1767.85 1296.96,1811.16 1340.26,1811.16 1383.57,1811.16 1296.96,1854.47 1340.26,1854.46 1383.57,1854.47

## Polygon pours and split planes (outlines as drawn)
GND on Top Layer "GND_L01_P026" (solid, remove dead copper, pour order 26): 0,11.53 0,2764.76 1769.05,2764.76 1769.05,11.53
VCC_5V on Top Layer "Top Layer-VCC_5V1" (solid, pour order 25): 1325.87,2431.84 1343.21,2411.46 1372.94,2411.46 1402.95,2381.45 1402.95,2351.72 1394.99,2343.76 1183.3,2343.76 1183.74,2411.25 1260.14,2411.46 1271.49,2422.8 1271.49,2467.17 1325.87,2467.17
VCC_5V on Top Layer "Top Layer-VCC_5V" (solid, pour order 22): 1325.87,2431.84 1343.21,2411.46 1372.94,2411.46 1402.95,2381.45 1402.95,2351.72 1394.99,2343.76 1183.3,2343.76 1183.74,2411.25 1260.14,2411.46 1271.49,2422.8 1271.49,2467.17 1325.87,2467.17
Net*4_3 on Top Layer "Top Layer-Net*_3" (solid, pour order 18): 964.39,2513.43 823.18,2513.43 670.61,2360.87 460.09,2360.87 371.98,2275.52 371.98,2175.49 704.53,2175.49 1042.59,2513.55 1042.59,2554.71 1005.67,2554.71
GND on Bottom Layer "GND_L02_P024" (solid, remove dead copper, pour order 24): 0,11.53 0,2764.76 1769.05,2764.76 1769.05,11.53

## Keep-outs
Keep-Out Layer:
  the board outline again, w10

## Other copper
Top Layer:
  pour cut-out: 186.58,1732.6 279.46,1732.6 279.46,1658.87 186.58,1658.87
  region net GND: 710.69,2652.4 1212.85,2652.4 1222.1,2643.15 1222.1,2594.8 1184.92,2594.8 1162.09,2617.63 969.01,2617.63 895.9,2544.52 792.1,2544.52 726.73,2479.15 709.13,2479.15
Bottom Layer:
  pour cut-out: 186.58,1732.6 279.45,1732.6 279.45,1658.86 186.58,1658.86

## Silkscreen, mask and mechanical layers (free items; w line width, h text height)
Top Overlay:
  drawing of 9 lines, arcs and shapes, not listed
  text "Micls" at 520.45,2157.76 h100
  text "BOOT1" at 527.31,1953.16 h45
  text "BOOT0" at 526.57,1871.67 h45
  text "ST-LINK" at 1637.22,1225.82 h45 r90
  text "MPU-6050" at 138.88,1059.1 h45 r90
  text "SERVOR" at 1401.25,844.59 h45 r90
  text "M" at 517.39,496.36 h300
  text "MOTOR" at 1401.25,447.96 h45 r90
  text "UART" at 1160.5,50.83 h45
Bottom Overlay:
  region: 191 vertices and 1 holes, not listed, extent 582.1,915.83 1174.1,1403.83
  text "Bug v1.3" at 1014.91,408.39 h40

## Text inside footprints (layer, text, board x,y; h text height)
J1: Mechanical 2 "PCB Edge" at 1793.73,1788.27 h16 r90